# Altium PCB Amber_Main_Board.PcbDoc (part 1 of 6)
Units mm, origin at the board's own origin, x right, y up, seen from the top; angles counter-clockwise.
Board outline 90 x 23 mm, 4 copper layers (Top Layer, Power, Ground, Bottom Layer), stack 1.142 mm thick; 237 components, 104 nets, 614 pads, 347 vias.
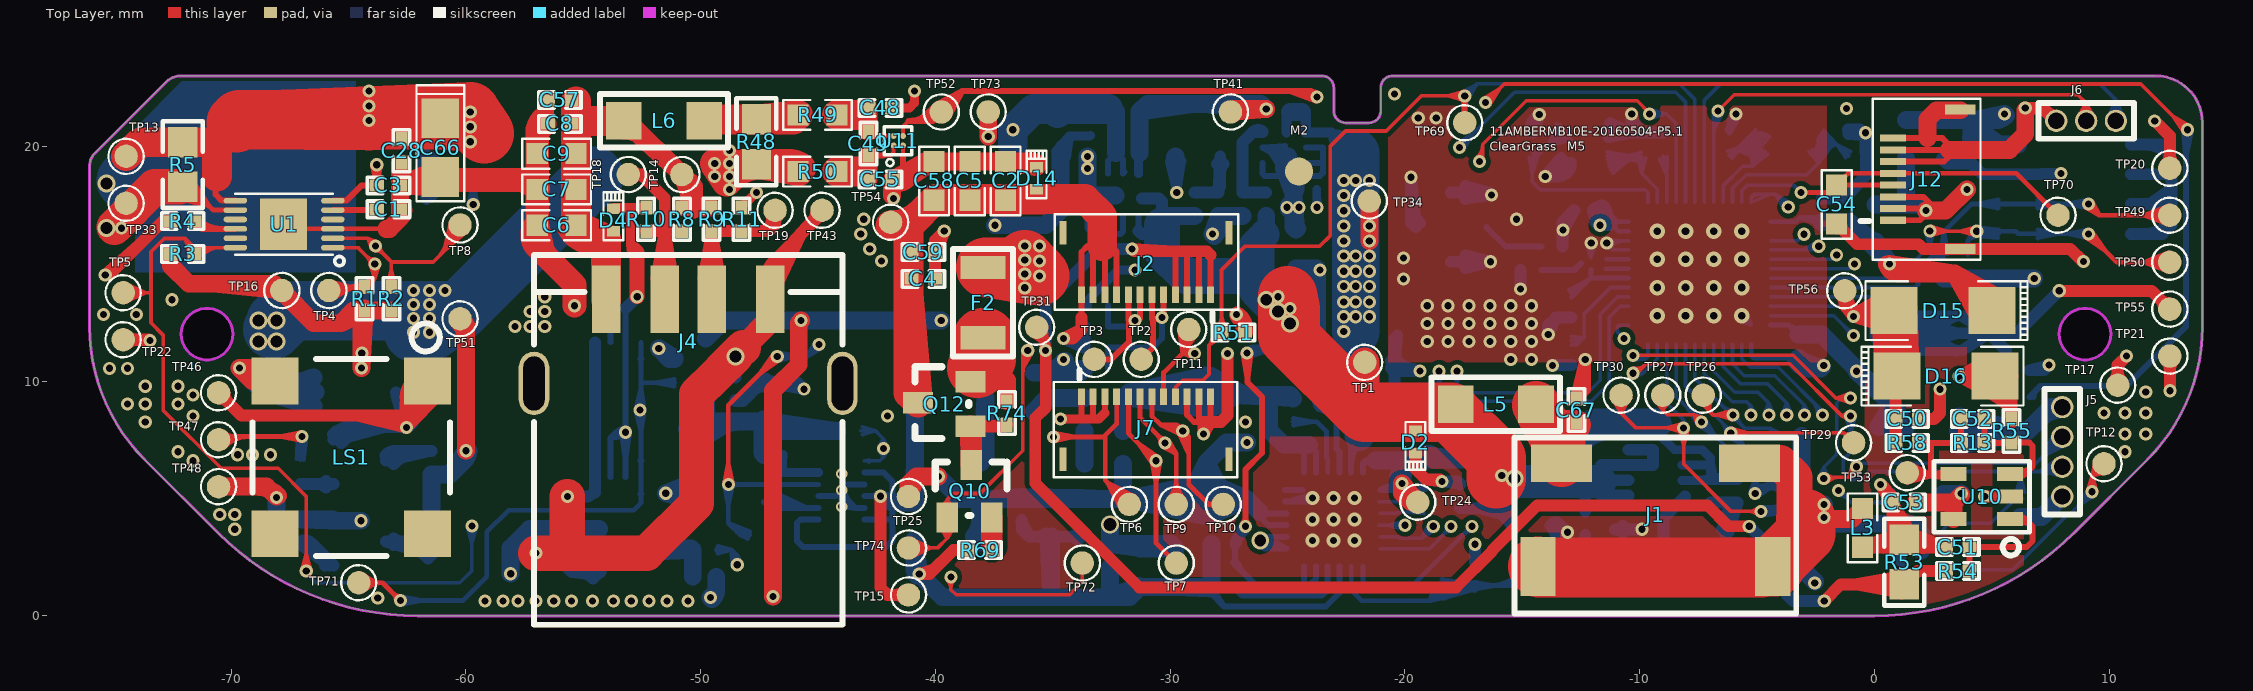
[diagram p0: Top Layer view]
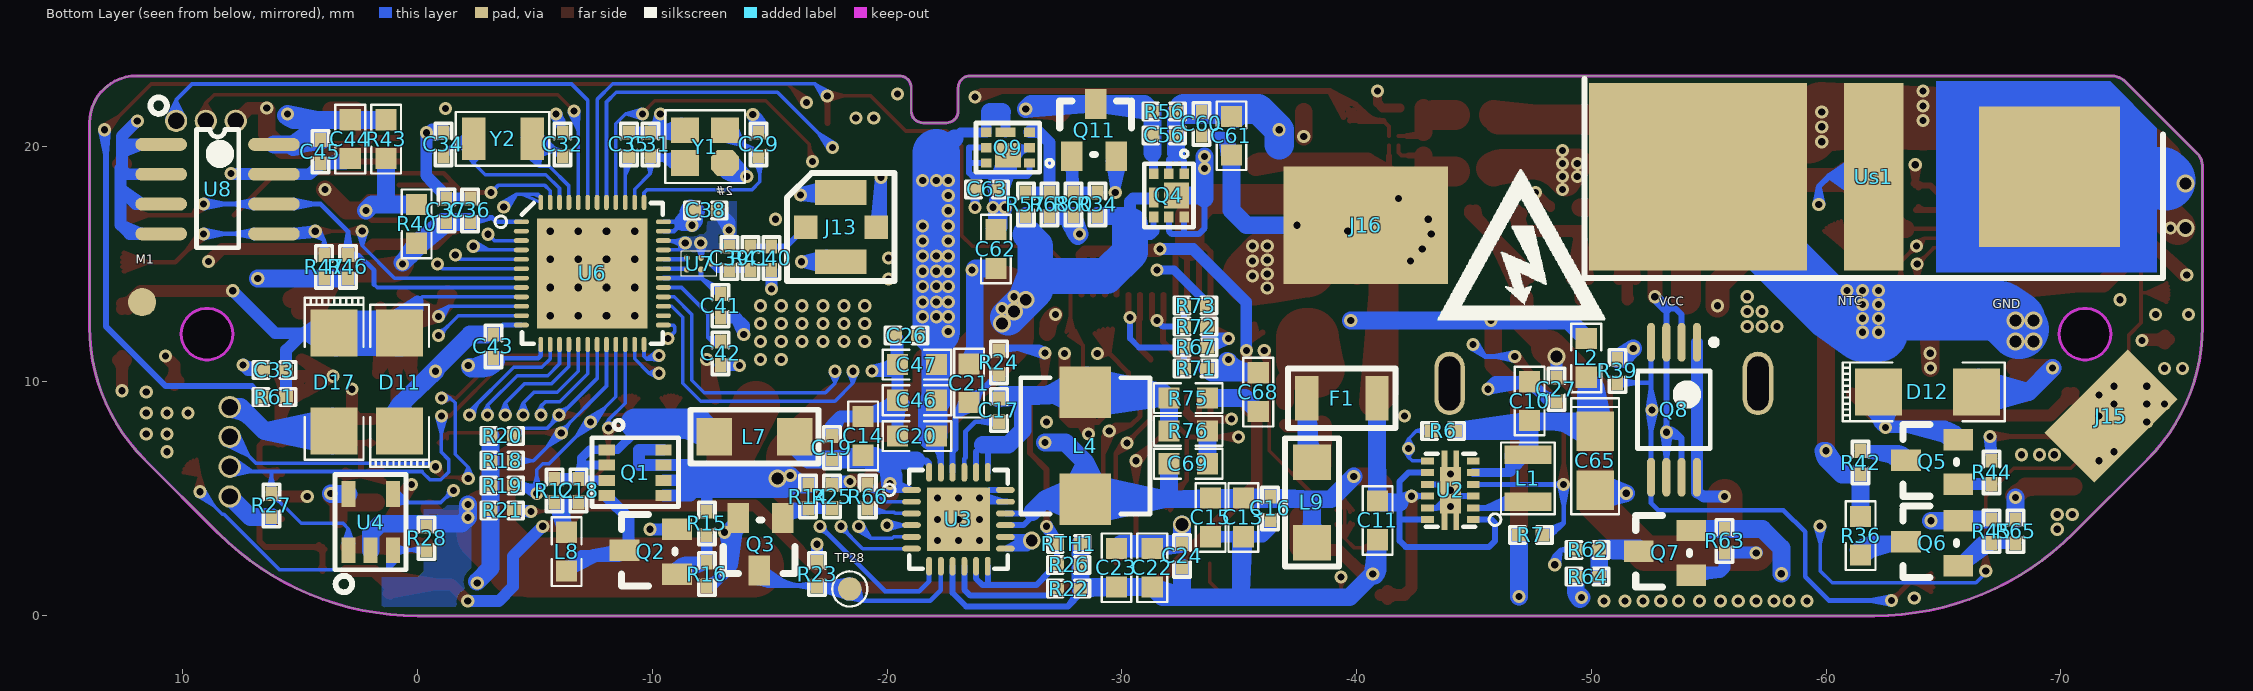
[diagram p1: Bottom Layer view, seen from below]
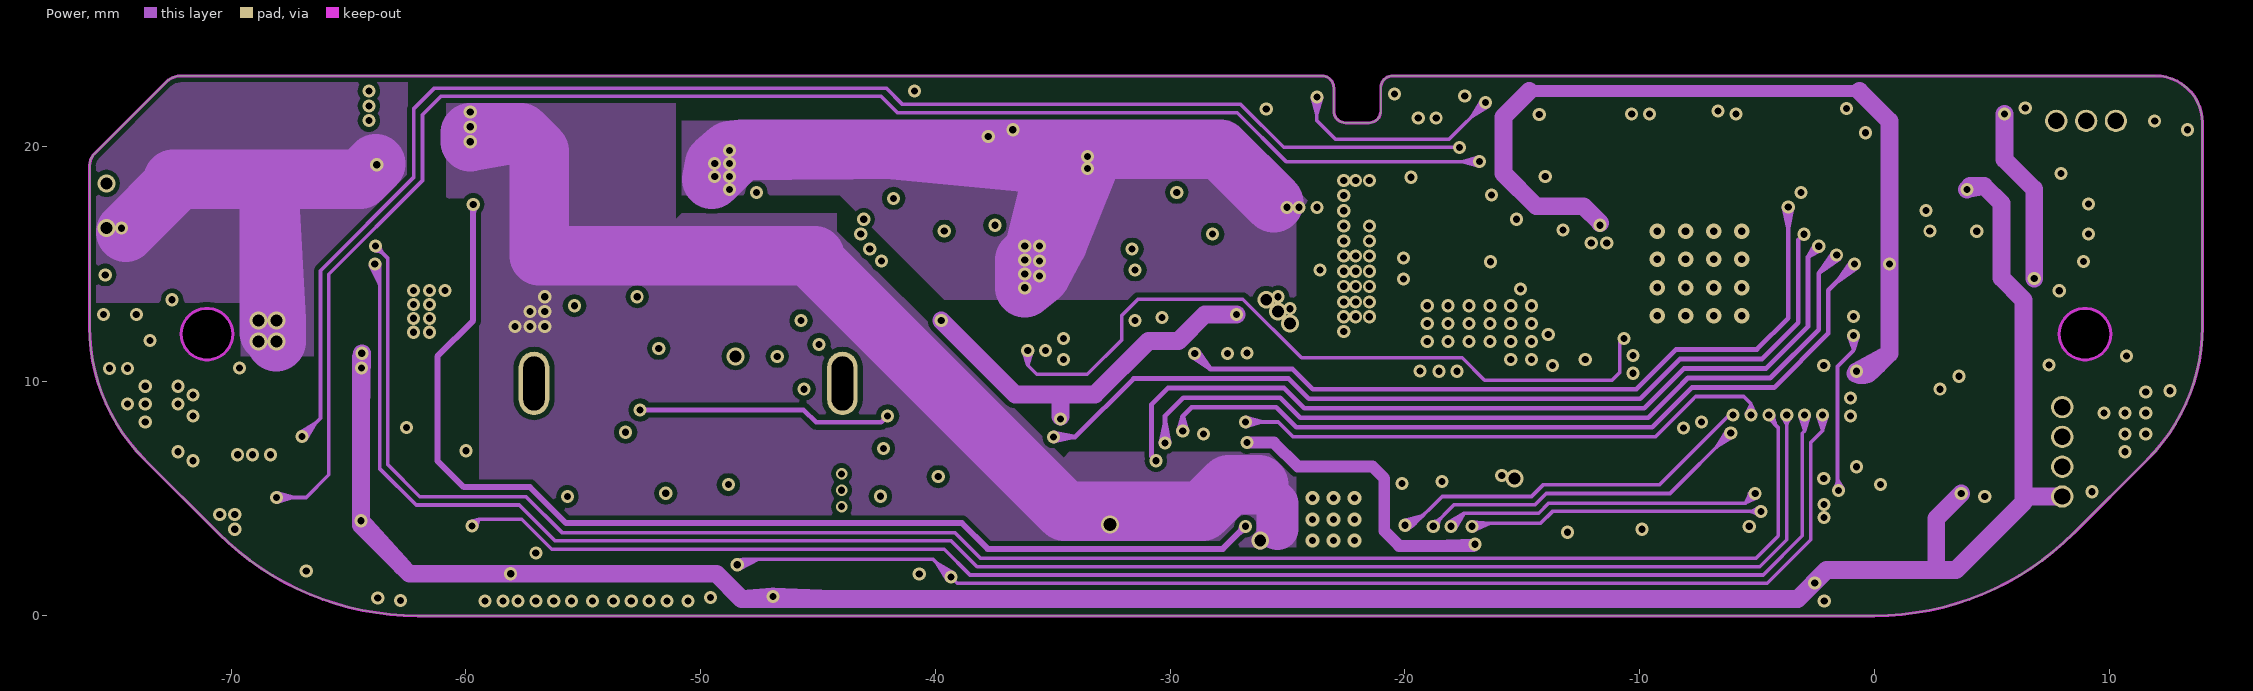
[diagram p2: Power]
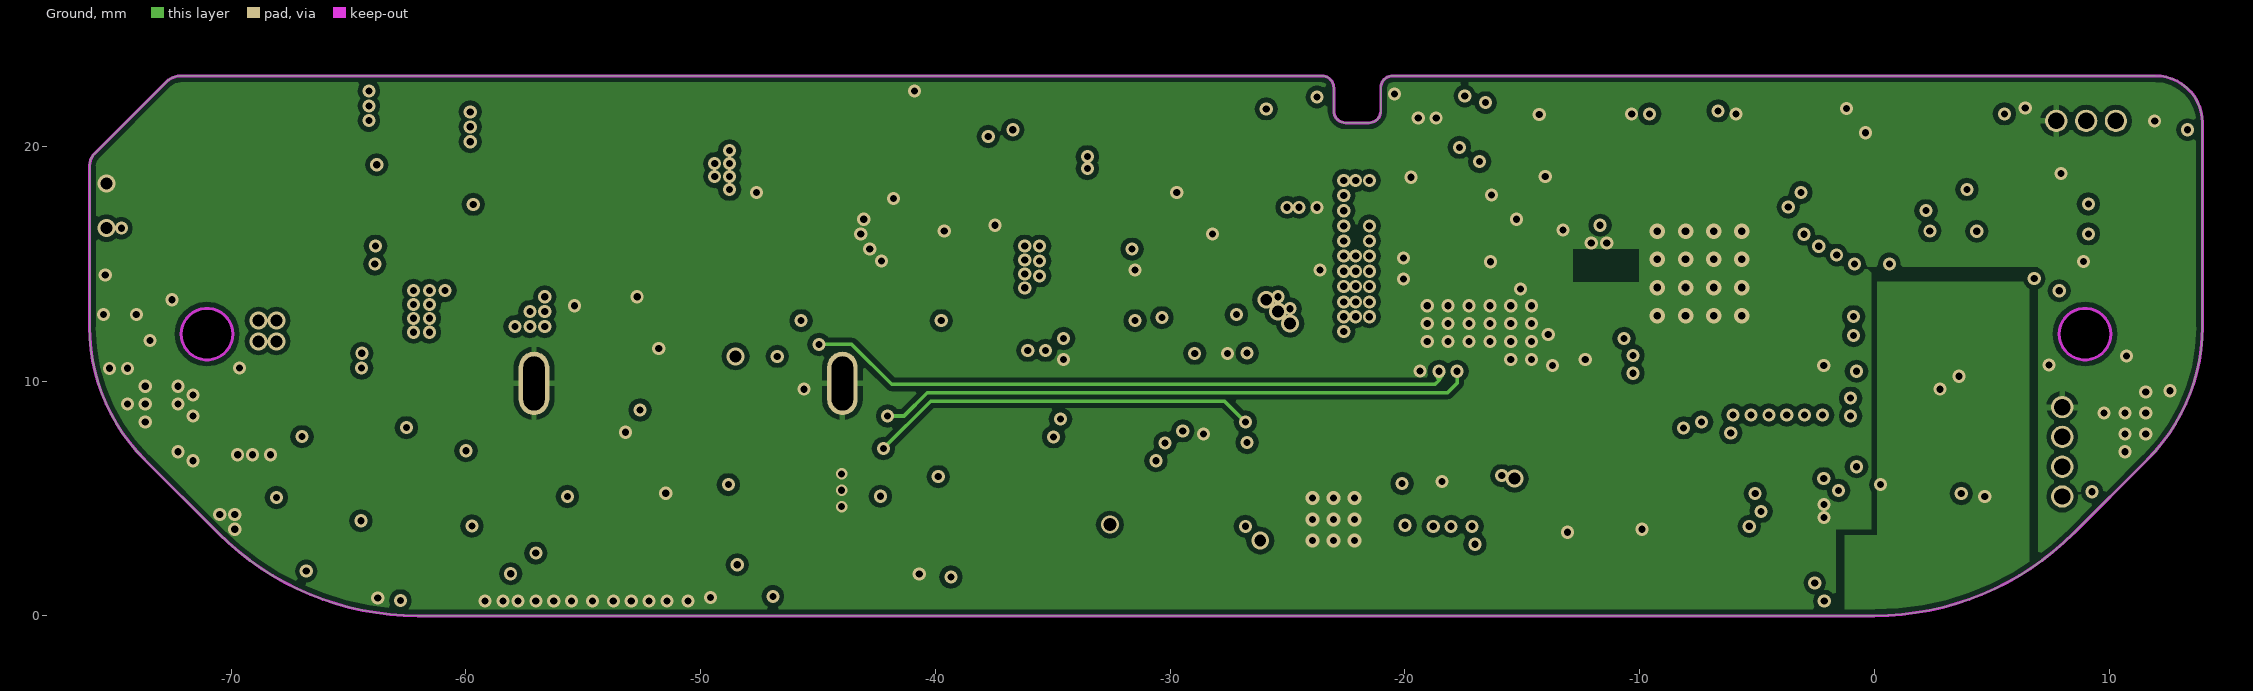
[diagram p3: Ground]
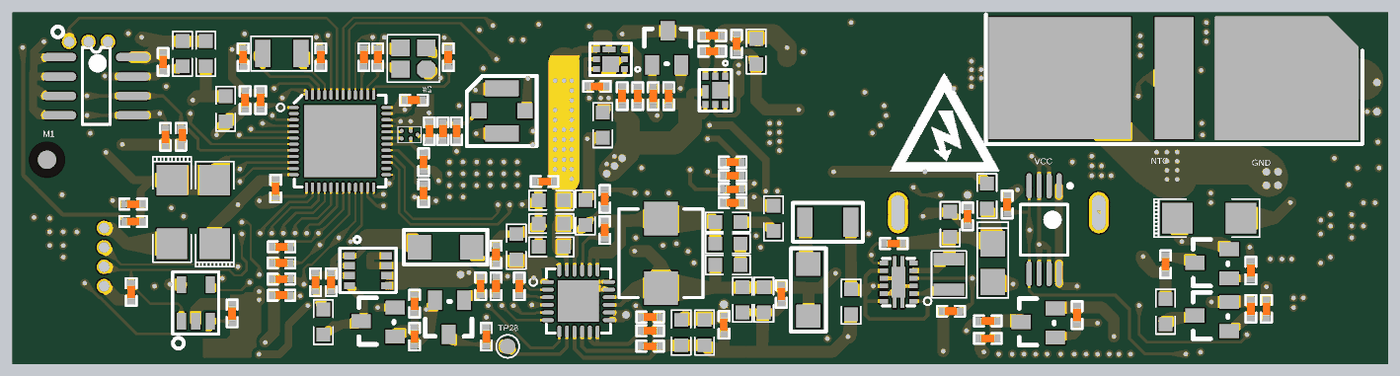
[diagram p9: 3D render of the assembled board from below, using the file's embedded part models]

## Layer stack, top to bottom
Top Layer: signal copper 0.0356
Dielectric: core 0.36, FR-4, Dk 4.8
Power: signal copper 0.0356
Dielectric: prepreg 0.32, FR-4, Dk 4.8
Ground: signal copper 0.0356
Dielectric: core 0.32, FR-4, Dk 4.8
Bottom Layer: signal copper 0.0356

## Board outline
-73.687,6.657 cw(c-68.03,12.314) -76.03,12.314 -76.03,19.177 cw(c-75.313,19.177) -75.82,19.684 -72.765,22.739 cw(c-72.136,22.111) -72.136,23 -23.53,23 cw(c-23.539,22.491) -23.03,22.482 -23.03,22.5 -23.03,21.5 ccw(c-22.53,21.5) -22.53,21 -21.53,21 ccw(c-21.53,21.5) -21.03,21.5 -21.03,22.5 cw(c-20.521,22.491) -20.512,23 11.97,23 cw(c11.97,21) 13.97,21 13.97,12.314 13.97,12.313 cw(c5.97,12.313) 11.627,6.657 8.485,3.515 cw(c0,12) 0,0 -62.06,0 cw(c-62.06,12) -70.545,3.515
cut-out: -71.03,10.9 cw(c-71.03,12) -72.13,12 cw(c-71.03,12) -71.03,13.1 cw(c-71.03,12) -69.93,12 cw(c-71.03,12)
cut-out: 8.97,10.9 cw(c8.97,12) 7.87,12 cw(c8.97,12) 8.97,13.1 cw(c8.97,12) 10.07,12 cw(c8.97,12)
cut-out: -71.03,10.9 cw(c-71.03,12) -72.13,12 cw(c-71.03,12) -71.03,13.1 cw(c-71.03,12) -69.93,12 cw(c-71.03,12)

## Design rules (kind name [scope] priority, off if disabled: settings)
Clearance [All] p1: gap=0.203
HoleSize [All] p1: absolutevalues=TRUE maxlimit=5.08 minlimit=0.025 maxpercent=80.000 minpercent=20.000
HoleToHoleClearance [All] p1 off: gap=0.254 allowstackedmicrovias=TRUE
MinimumSolderMaskSliver [All] p1: minsoldermaskwidth=0
PolygonConnect PolygonConnect_1 [IsVia] p1: connectstyle=Direct reliefconductorwidth=0.254 reliefentries=4 polygonreliefangle="90 Angle"
PolygonConnect [All] p2: connectstyle=Relief reliefconductorwidth=0.254 reliefentries=4 polygonreliefangle="90 Angle"
RoutingVias [All] p1: holewidth=0.711 width=1.27 viastyle="Through Hole" minholewidth=0.711 minwidth=1.27 maxholewidth=0.711 maxwidth=1.27
SilkToSilkClearance [All] p1: silktosilkclearance=0
SilkscreenOverComponentPads [All] p1: minsilkscreentomaskgap=0
SolderMaskExpansion [All] p1: expansion=0.102
Width [All] p1: maxlimit=5.08 minlimit=0.152 preferedwidth=0.254
23 further rules are at their usual default settings.

## Classes and differential pairs
component class WindCharger: C56 C60 C61 C62 C63 Q4 Q9 Q11 R34 R56 R57 R60 R68 TP41 TP73
component class "Management of Charging,Discharging,Tri-axis angle sensor": C13 C14 C15 C16 C17 C18 C19 C20 C21 C22 C23 C24 C26 C46 C47 C68 C69 F1 L4 L7 L8 L9 Q1 Q2 Q3 R9 R11 R15 R16 R18 R19 R20 R21 R22 R23 R24 R25 R26 R66 R75 R76 RTH1 Text TP24 TP25 TP26 TP27 TP28 TP29 TP30 TP34 U3
component class "BLE MCU,Watch Dog and Reset,EEPROM,Buzzer": A1 C29 C31 C32 C33 C34 C35 C36 C37 C38 C39 C40 C41 C42 C43 C44 C45 C50 D9 D11 D15 D16 D17 J5 J6 J13 L3 R27 R28 R40 R41 R43 R46 R47 R58 R61 TP12 TP49 TP50 TP55 TP56 U4 U6 U7 U8 Y1 Y2
component class "Charge,Discharge,Battery Monitor,DC DC BUCK": C1 C2 C3 C4 C5 C6 C7 C8 C9 C10 C11 C27 C28 C57 C58 C59 C65 C66 C67 D2 D4 D14 J1 J2 J4 L1 L2 L5 L6 Q7 Q8 R1 R2 R3 R4 R5 R6 R7 R8 R9 R10 R11 R39 R62 R63 R64 R67 R71 R72 R73 TP1 TP2 TP3 TP4 TP5 TP8 TP13 TP14 TP15 TP16 TP17 TP18 TP19 TP20 TP21 TP22 TP31 TP33 TP43 TP54 TP71 TP72 U1 U2 Us1
component class "Breath LED,Temp,Touch key,Motor": C48 C49 C51 C52 C53 C54 C55 D12 F2 J7 J12 J15 J16 LS1 M1 M2 Q5 Q6 Q10 Q12 R13 R36 R42 R44 R45 R48 R49 R50 R51 R53 R54 R55 R65 R69 R74 TP6 TP7 TP9 TP10 TP11 TP46 TP47 TP48 TP51 TP52 TP53 TP69 TP70 TP74 U10 U11

## Components (designator, comment, footprint, x,y, rotation, side; value= is the part's Value field where it differs from the comment)
C1 "0.47uF/10V/X7R/10%" 0402C -63.3,17.317 r0 top
C2 "22uF/10V/X5R/20%" 0603C -37.011,18.523 r90 top
C3 "1uF/10V/X7R/10%" 0402C -63.3,18.333 r0 top
C4 "0.1uF/10V/X7R/10%" 0402C -40.513,14.351 r0 top
C5 "22uF/10V/X5R/20%" 0603C -38.535,18.523 r90 top
C6 "22uF/10V/X5R/20%" 0603C -56.134,16.637 r180 top
C7 "22uF/10V/X5R/20%" 0603C -56.134,18.161 r180 top
C8 "0.1uF/10V/X7R/10%" 0402C -55.999,20.955 r180 top
C9 "22uF/10V/X5R/20%" 0603C -56.134,19.685 r180 top
C10 "10uF/10V/X7R/10%" 0603C -47.371,9.144 r90 bottom
C11 "10uF/10V/X7R/10%" 0603C -40.894,4.064 r270 bottom
C13 "10uF/10V/X7R/10%" 0603C -35.179,4.191 r270 bottom
C14 "10uF/10V/X7R/10%" 0603C -18.977,7.665 r90 bottom
C15 "10uF/10V/X7R/10%" 0603C -33.782,4.191 r270 bottom
C16 "0.1uF/10V/X7R/10%" 0402C -36.322,4.572 r270 bottom
C17 "47nF/10V/X7R/10%" 0402C -24.765,8.763 r270 bottom
C18 "1nF/10V/X7R/5%" 0402C -6.858,5.334 r90 bottom
C19 "1uF/10V/X7R/10%" 0402C -17.653,7.157 r90 bottom
C20 "22uF/10V/X5R/20%" 0603C -21.273,7.654 r0 bottom
C21 "4.7uF/10V/X7R/10%" 0603C -23.495,9.906 r90 bottom
C22 "22uF/10V/X5R/20%" 0603C -31.296,2.045 r270 bottom
C23 "22uF/10V/X5R/20%" 0603C -29.772,2.045 r270 bottom
C24 "0.1uF/10V/X7R/10%" 0402C -32.566,2.553 r270 bottom
C26 "0.1uF/10V/X7R/5%" 0402C -20.828,11.938 r180 bottom
C27 "0.1uF/10V/X7R/10%" 0402C -48.514,9.652 r270 bottom
C28 "0.1uF/10V/X7R/10%" 0402C -62.738,19.812 r270 top
C29 "12pF/16V/NPO/10%" 0402C -14.532,20.079 r270 bottom
C31 "12pF/16V/NPO/10%" 0402C -9.913,20.079 r270 bottom
C32 "12pF/16V/NPO/10%" 0402C -6.18,20.079 r270 bottom
C33 "0.1uF/10V/X7R/10%" 0402C 6.096,10.459 r0 bottom
C34 "12pF/16V/NPO/10%" 0402C -1.1,20.079 r270 bottom
C35 "0.1uF/10V/X7R/10%" 0402C -9.006,20.079 r270 bottom
C36 "0.1uF/10V/X7R/10%" 0402C -2.243,17.267 r270 bottom
C37 "1uF/10V/X7R/10%" 0402C -1.227,17.267 r270 bottom
C38 "1nF/10V/X7R/5%" 0402C -12.276,17.267 r0 bottom
C39 "0.2pF" 0402C -13.292,15.235 r90 bottom
C40 "DNM" 0402C -15.07,15.235 r270 bottom
C41 "2.2nF/10V/X7R/10%" 0402C -12.911,13.203 r90 bottom
C42 "47nF/10V/X7R/10%" 0402C -12.911,11.176 r90 bottom
C43 "0.1uF/10V/X7R/10%" 0402C -3.229,11.475 r90 bottom
C44 "10uF/10V/X7R/10%" 0603C 2.87,20.301 r270 bottom
C45 "0.1uF/10V/X7R/10%" 0402C 4.137,19.766 r270 bottom
C46 "22uF/10V/X5R/20%" 0603C -21.273,9.178 r0 bottom
C47 "22uF/10V/X5R/20%" 0603C -21.273,10.702 r0 bottom
C48 "0.1uF/10V/X7R/10%" 0402C -42.345,21.635 r180 top
C49 "1uF/10V/X7R/10%" 0402C -42.853,20.111 r270 top
C50 "0.1uF/10V/X7R/10%" 0402C 1.397,8.382 r0 top
C51 "1uF/10V/X7R/10%" 0402C 3.556,2.921 r0 top
C52 "1uF/10V/X7R/10%" 0402C 4.191,8.382 r180 top
C53 "1uF/10V/X7R/10%" 0402C 1.27,4.826 r0 top
C54 "10uF/10V/X7R/10%" 0603C -1.608,17.521 r270 top
C55 "0.1uF/10V/X7R/10%" 0402C -42.345,18.587 r0 top
C56 "1nF/10V/X7R/5%" 0402C -31.804,20.46 r180 bottom
C57 "0.1uF/10V/X7R/10%" 0402C -55.999,21.971 r180 top
C58 "22uF/10V/X5R/20%" 0603C -40.059,18.523 r90 top
C59 "0.1uF/10V/X7R/10%" 0402C -40.513,15.494 r0 top
C60 "1uF/10V/X7R/10%" 0402C -33.401,20.955 r270 bottom
C61 "10uF/10V/X7R/10%" 0603C -34.671,20.447 r270 bottom
C62 "10uF/10V/X7R/10%" 0603C -24.638,15.621 r270 bottom
C63 "1uF/10V/X7R/10%" 0402C -24.257,18.161 r0 bottom
C65 "220uF/6.3V" 3216 -50.165,6.604 r270 bottom
C66 "220uF/6.3V" 3216 -61.087,19.939 r270 top
C67 "0.1uF/10V/X7R/10%" 0402C -12.7,8.763 r90 top
C68 "1nF/10V/X7R/5%" 0603C -35.814,9.525 r90 bottom
C69 "1uF/10V/X7R/5%" 0603C -32.829,6.477 r180 bottom
D2 "VMNZC6.8CST2RA" 0402 -19.558,7.874 r270 top
D4 "VMNZC6.8CST2RA" 0402 -53.721,16.383 r90 top
D11 "RB160MM-30TR" DO-214AC 0.762,9.951 r270 bottom
D12 "RB160MM-30TR" DO-214AC -64.316,9.538 r0 bottom
D14 "VMNZC6.8CST2RA" 0402 -35.687,18.161 r90 top
D15 "RB160MM-30TR" DO-214AC 2.921,12.999 r0 top
D16 "RB160MM-30TR" DO-214AC 3.048,10.205 r180 top
D17 "RB160MM-30TR" DO-214AC 3.556,9.951 r90 bottom
F1 "250MA" 1206-FUSE -39.37,9.271 r180 bottom
F2 "500MA" 1206-FUSE -37.973,13.335 r270 top
J1 "MICRO_USB_B" MICRO-USB-AVX-PAD -9.33,4.3 r180 top locked
J2 "PoGo Pin Connector" FPC_CON12-BACK-MOLEX -31.03,15 r270 top locked
J4 "USB_A" USB_A_FCI -50.53,11.687 r270 top locked
J5 "Program" "PROGRAM - 1.27" 8.001,6.985 r90 top
J6 "Debug" "Debug- 1.27" 8.382,21.082 r180 top
J7 "Connector" FPC_CON12-BACK-MOLEX -31.03,8 r90 top locked
J12 "Hall Connector" FPC_CON8-KYOCERA 2.23,18.598 r180 top locked
J13 "IPEX" IPEX -18.034,16.555 r270 bottom locked
J15 "PAD1" PAD1 25.389,4.272 r180 bottom
J16 "PAD2" PAD2 21.844,-4.191 r180 bottom
L1 "1239AS-H-2R2M" 2520-TOKO -47.298,5.855 r90 bottom
L2 "BLM18AG601SN1" 0603R -49.784,10.16 r90 bottom
L3 "BLM18AG601SN1" 0603R -0.508,2.921 r90 top
L4 "2.2uH" MMD -28.448,7.239 r270 bottom locked
L5 "B5H DC1206RA601H30T" 1206 -16.129,9.017 r0 top
L6 "B5H DC1206RA601H30T" 1206 -51.562,21.082 r180 top
L7 "B5H DC1206RA601H30T" 1206 -14.351,7.633 r0 bottom
L8 "BLM18AG601SN1" 0603R -6.35,1.905 r90 bottom
L9 "B5H DC1206RA601H30T" 1206 -38.1,4.826 r270 bottom
LS1 "Buzzle" "BUZZER 7525" -64.886,6.744 r90 top
M1 "MARK" "MARK POINT"#1 11.734,13.36 r180 bottom
M2 "MARK" "MARK POINT"#2 -24.511,18.923 r0 top
Q1 "RQ1E050RPTR" TSMT8 -9.271,6.096 r180 bottom
Q2 "RK7002BMT116" SOT23 -11.049,1.778 r90 bottom
Q3 "RK7002BMT116" SOT23 -15.563,4.158 r0 bottom
Q4 "CSD25310Q2" DQK -32.004,17.907 r0 bottom
Q5 "2SA1036KT146R" SMT3 -65.633,5.601 r90 bottom
Q6 "RRR030P03TL" TSMT3 -64.516,3.093 r90 bottom
Q7 "RRR030P03TL" TSMT3 -53.14,2.68 r90 bottom
Q8 "GM8205A" TSSOP-8 -53.521,8.776 r270 bottom
Q9 "CSD25310Q2" DQK -25.146,19.939 r90 bottom
Q10 "RK7002BMT116" SOT23 -39.497,4.191 r0 top
Q11 "RK7002BMT116" SOT23 -27.867,19.571 r180 bottom
Q12 "RRR030P03TL" TSMT3 -39.624,9.017 r90 top
R1 "4.7K/1%" 0402R -64.316,13.507 r270 top
R2 "4.7K/1%" 0402R -63.173,13.507 r270 top
R3 "10K/1%" 0402R -72.063,15.412 r180 top
R4 "10K/1%" 0402R -72.063,16.809 r0 top
R5 "0.01R/1%" 0805 -72.063,19.222 r90 top
R6 "1M/1%" 0402R -43.688,7.874 r180 bottom
R7 "100K/1%" 0402R -47.425,3.442 r0 bottom
R8 "75K" 0402R -50.8,16.891 r270 top
R9 "43K" 0402R -49.53,16.891 r270 top
R10 "51K" 0402R -52.324,16.891 r90 top
R11 "51K" 0402R -48.26,16.891 r90 top
R12 "10K/1%" 0402R -5.842,5.334 r90 bottom
R13 "20K/1%" 0402R 4.191,7.366 r180 top
R14 "121K/1%" 0402R -16.637,5.08 r90 bottom
R15 "262K/1%" 0402R -12.319,3.937 r90 bottom
R16 "180K/1%" 0402R -12.319,1.778 r90 bottom
R18 "10K/1%" 0402R -3.61,6.606 r180 bottom
R19 "10K/1%" 0402R -3.61,5.548 r180 bottom
R20 "10K/1%" 0402R -3.61,7.665 r180 bottom
R21 "10K/1%" 0402R -3.61,4.49 r180 bottom
R22 "332R/1%" 0402R -27.74,1.156 r0 bottom
R23 "100K/1%" 0402R -17.018,1.778 r90 bottom
R24 "5.49K/1%" 0402R -24.765,10.795 r90 bottom
R25 "82K/1%" 0402R -17.653,5.08 r270 bottom
R26 "30.9K/1%" 0402R -27.74,2.172 r180 bottom
R27 "10K/1%" 0402R 6.223,4.699 r90 bottom
R28 "63K/1%" 0402R -0.381,3.302 r90 bottom
R34 "262K/1%" 0402R -28.956,17.526 r270 bottom
R36 "0R/1%" 0603R -61.468,4.236 r270 bottom
R39 "1M/1%" 0402R -51.108,10.427 r90 bottom
R40 "0R/1%" 0603R 0.043,17.521 r270 bottom
R41 "10nH" 0402R -14.181,15.235 r270 bottom
R42 "0R/1%" 0402R -61.468,6.522 r90 bottom
R43 "0R/1%" 0603R 1.343,21.127 r270 bottom
R44 "1K/1%" 0402R -67.056,6.109 r90 bottom
R45 "100K/1%" 0402R -67.056,3.601 r270 bottom
R46 "4.7K/1%" 0402R 2.964,14.862 r270 bottom
R47 "4.7K/1%" 0402R 3.98,14.862 r270 bottom
R48 "10mR/1%" 0805 -47.625,20.193 r90 top
R49 "0R" 0603R -45.847,21.336 r0 top
R50 "0R" 0603R -45.847,18.923 r0 top
R51 "10K/1%" 0402R -27.305,12.065 r180 top
R53 "50mR/1%" 0805 1.27,2.286 r270 top
R54 "1K/1%" 0402R 3.556,1.905 r0 top
R55 "1K/1%" 0402R 5.842,7.874 r90 top
R56 "10K/1%" 0402R -31.804,21.476 r180 bottom
R57 "0R/1%" 0402R -25.908,17.526 r270 bottom
R58 "1K/1%" 0402R 1.397,7.366 r180 top
R60 "180K/1%" 0402R -27.94,17.526 r90 bottom
R61 "0R/1%" 0402R 6.096,9.316 r180 bottom
R62 "0R/1%" 0402R -49.838,2.807 r180 bottom
R63 "100K/1%" 0402R -55.68,3.188 r270 bottom
R64 "1M/1%" 0402R -49.838,1.664 r180 bottom
R65 "1K/1%" 0402R -68.072,3.601 r90 bottom
R66 "200R/1%" 0402R -19.177,5.08 r270 bottom
R67 "75K" 0402R -33.139,11.43 r0 bottom
R68 "1M/1%" 0402R -26.924,17.526 r90 bottom
R69 "10K" 0402R -38.1,2.794 r0 top
R71 "51K" 0402R -33.139,10.541 r180 bottom
R72 "43K" 0402R -33.139,12.319 r0 bottom
R73 "51K" 0402R -33.139,13.208 r180 bottom
R74 "549K" 0402R -36.957,8.636 r270 top
R75 "100R/1%" 0603R -32.004,9.271 r180 bottom
R76 "100R/1%" 0603R -32.004,7.874 r180 bottom
RTH1 "10K/1%" 0402R -27.74,3.061 r180 bottom
TP1 "TEST" "TEST PAD" -21.717,10.795 r90 top
TP2 "TEST" "Test Pad" -31.233,10.922 r90 top
TP3 "TEST" "Test Pad" -33.233,10.922 r90 top
TP4 "TEST" "TEST PAD" -65.84,13.856 r90 top
TP5 "TEST" "TEST PAD" -74.603,13.761 r90 top
TP6 "TEST" "Test Pad" -31.74,4.744 r90 top
TP7 "TEST" "Test Pad" -29.74,2.244 r90 top
TP8 "TEST" "TEST PAD" -60.252,16.65 r90 top
TP9 "TEST" "Test Pad" -29.74,4.744 r90 top
TP10 "TEST" "Test Pad" -27.74,4.744 r90 top
TP11 "TEST" "Test Pad" -29.21,12.192 r90 top
TP12 "TEST" "Test Pad" 9.779,6.477 r90 top
TP13 "TEST" "TEST PAD" -74.476,19.571 r90 top
TP14 "TEST" "TEST PAD" -50.8,18.796 r90 top
TP15 "TEST" "TEST PAD" -41.148,0.889 r90 top
TP16 "TEST" "TEST PAD" -67.84,13.856 r90 top
TP17 "TEST" "TEST PAD" 10.36,9.824 r0 top
TP18 "TEST" "TEST PAD" -53.086,18.796 r90 top
TP19 "TEST" "TEST PAD" -46.831,17.272 r90 top
TP20 "TEST" "TEST PAD" 12.584,19.063 r90 top
TP21 "TEST" "TEST PAD" 12.584,11.063 r90 top
TP22 "TEST" "TEST PAD" -74.603,11.761 r90 top
TP24 "TEST" "TEST PAD" -19.453,4.839 r90 top
TP25 "TEST" "TEST PAD" -41.148,5.08 r90 top
TP26 "TEST" "TEST PAD" -7.293,9.398 r90 top
TP27 "TEST" "TEST PAD" -9.017,9.398 r90 top
TP28 "TEST" "TEST PAD" -18.415,1.143 r270 bottom
TP29 "TEST" "TEST PAD" -0.889,7.366 r90 top
TP30 "TEST" "TEST PAD" -10.795,9.398 r90 top
TP31 "TEST" "TEST PAD" -35.687,12.287 r90 top
TP33 "TEST" "Test Pad" -74.476,17.571 r90 top
TP34 "TEST" "TEST PAD" -21.517,17.666 r90 top (schematic designator TP16)
TP41 "TEST" "TEST PAD" -27.432,21.463 r0 top
TP43 "TEST" "TEST PAD" -44.831,17.272 r90 top
TP46 "TEST" "TEST PAD" -70.539,9.5 r90 top
TP47 "TEST" "TEST PAD" -70.539,7.5 r90 top
TP48 "TEST" "TEST PAD" -70.539,5.5 r90 top
TP49 "TEST" "TEST PAD" 12.584,17.063 r90 top
TP50 "TEST" "TEST PAD" 12.584,15.063 r90 top
TP51 "TEST" "TEST PAD" -60.252,12.65 r90 top
TP52 "TEST" "TEST PAD" -39.751,21.463 r90 top
TP53 "TEST" "Test Pad" 1.397,6.096 r90 top
TP54 "TEST" "Test Pad" -41.91,16.764 r90 top
TP55 "TEST" "Test Pad" 12.584,13.063 r90 top
TP56 "TEST" "Test Pad" -1.27,13.843 r90 top
TP69 "TEST" "Test Pad" -17.453,21 r90 top
TP70 "TEST" "Test Pad" 7.82,17.063 r90 top
TP71 "TEST" "Test Pad" -64.57,1.41 r90 top
TP72 "TEST" "Test Pad" -33.74,2.244 r90 top
TP73 "TEST" "Test Pad" -37.751,21.463 r90 top
TP74 "TEST" "Test Pad" -41.148,2.889 r90 top
U1 "BQ27441DRZR-G1A" DRZ -67.745,16.682 r180 top
U2 "TPS62740DSSR" DSS -43.996,5.347 r0 bottom
U3 "BQ24195RGER" RGE -23.041,4.109 r180 bottom
U4 "STWD100YNYWY3F" SOT23-5 1.997,3.988 r90 bottom
U6 "nRF51822QFAA" QFN48 -7.447,14.583 r180 bottom
U7 "BAL-NRF01D3" ECOPACK -11.992,14.999 r180 bottom
U8 "M24C64R-D RMN6TP/P" SO8N 8.52,18.174 r180 bottom
U10 "LMV321IDBVR" SOT23-5 4.572,5.08 r180 top
U11 "INA216A3YFFR" YFF -41.583,20.238 r90 top
Us1 "PL605798P" BATTERY -62.03,18.7 r180 bottom locked
Y1 "16M" XTALSMD2-2520 -12.246,19.984 r180 bottom
Y2 "32.768K" XTALSMD2-3215 -3.64,20.315 r180 bottom

## Footprints (in the part's own frame and the unit in brackets; to place one, negate y for a bottom-side part, rotate by r counter-clockwise, add the part's x,y. Pads: shape width x height; smd on the part's side, far side on the other; paste and mask are expansions set on the pad)
0402 [mm]
  rect 0.45x0.55 smd: 1(0.95,0) 2(0,0)
  silkscreen extent -0.38,-0.42 1.65,0.42
0402C [mm]
  rect 0.6x0.5 smd: 1(-0.5,0) 2(0.5,0)
  silkscreen extent -0.9,-0.35 0.9,0.35, body extent -0.51,-0.25 0.51,0.25, height 0.5
0402R [mm]
  rect 0.6x0.5 smd: 1(-0.5,0) 2(0.5,0)
  silkscreen extent -0.9,-0.35 0.9,0.35, body extent -0.51,-0.25 0.51,0.25, height 0.5
0603C [mm]
  rect 0.9x0.9 smd: 1(-0.826,0) 2(0.826,0)
  silkscreen extent -1.46,-0.64 1.46,0.64, body extent -1.38,-0.55 1.38,0.55, height 0.9
0603R [mm]
  rect 0.9x0.9 smd: 1(0,0) 2(1.651,0)
  silkscreen extent -0.64,-0.64 2.29,0.64, body extent -0.55,-0.55 2.2,0.55, height 0.5
0805 [mm]
  rect 1.3x1.25 smd: 1(-0.95,0) 2(0.95,0)
  silkscreen extent -1.85,-0.85 1.85,0.85, body extent -1.7,-0.73 1.7,0.73, height 0.6
1206 [mm]
  rect 1.52x1.6 smd: 1(1.71,0) 2(-1.71,0)
  silkscreen extent -2.73,-1.14 2.73,1.14, body extent -2.57,-0.9 2.57,0.9, height 0.9
1206-FUSE [mm]
  rect 1x1.9 smd: 1(1.5,0) 2(-1.5,0)
  silkscreen extent -2.29,-1.27 2.29,1.27, body extent -2.43,-1.2 2.48,1.2, height 1.4
2520-TOKO [mm]
  rect 0.8x2 smd: 1(-1,0) 2(1,0)
  silkscreen extent -1.52,-1.14 1.52,1.14, body extent -1.5,-1.1 1.5,1.1, height 1.2
3216 [mm]
  rect 1.7x1.6 smd: 1(-1.256,0) 2(1.256,0)
  silkscreen extent -2.67,-1.02 2.29,1.02, body extent -1.72,-0.85 1.72,0.85, height 1.1
BATTERY [mm]
  rect 9.3x8 smd: 1(-7.485,0)
  rect 2.54x8 smd: 2(0,0)
  rect 6x6 smd: 3(7.485,0)
  Top Layer region: 2.667,-4.064 12.065,-4.064 12.065,2.064 10.065,4.064 2.667,4.064
"BUZZER 7525" [mm]
  rect 2x2 smd: 1(3.25,-3.25) 2(3.25,3.25) 3(-3.25,3.25) 4(-3.25,-3.25)
  silkscreen extent -4.2,-4.2 5.71,4.2, body extent -4.35,-4.35 4.35,4.35, height 2.5
"Debug- 1.27" [mm]
  round 0.95 hole 0.7: 1(-1.905,0) 2(-0.635,0) 3(0.635,0)
  silkscreen extent -2.67,-0.76 1.4,0.76, body extent -2.48,-0.58 1.21,0.58
DO-214AC [mm]
  rect 2x2 smd: 1(2.085,0) 2(-2.085,0)
  silkscreen extent -3.3,-1.25 3.6,1.25, body extent -3.19,-1.1 3.19,1.1, height 0.9
DQK [mm]
  rect 0.4x0.455 smd: 1(-0.65,-0.923) 2(0,-0.923) 3(0.65,-0.923) 4(0.65,0.923) 5(0,0.923) 6(-0.65,0.923)
  rect 1.05x1.1 smd: 7(-0.325,0)
  rect 0.4x0.85 smd: 8(0.65,0.096)
  silkscreen extent -1.05,-1.93 1.05,1.35, body extent -0.95,-1.25 0.95,1.25, height 0.8
DRZ [mm]
  oval 1x0.24 smd: 1(-2.075,1) 2(-2.075,0.6) 3(-2.075,0.2) 4(-2.075,-0.2) 5(-2.075,-0.6) 6(-2.075,-1) 7(2.075,-1) 8(2.075,-0.6) 9(2.075,-0.2) 10(2.075,0.2) 11(2.075,0.6) 12(2.075,1)
  rect 2x2.2 smd: 13(0.025,0)
  silkscreen extent -2.56,-1.3 2.08,1.77, body extent -2.68,-1.24 2.68,1.24, height 1
DSS [mm] "QFN, 12-Leads, Body 3.1x2.1mm (max), Pitch 0"
  rect 0.55x0.3 smd: 1(-0.975,1.25) 2(-0.975,0.75) 3(-0.975,0.25) 4(-0.975,-0.25) 5(-0.975,-0.75) 6(-0.975,-1.25) 7(0.975,-1.25) 8(0.975,-0.75) 9(0.975,-0.25) 10(0.975,0.25) 11(0.975,0.75) 12(0.975,1.25)
  rect 0.9x2 smd: 13(0,0)
  rect 0.25x0.7 smd: 14(-0.25,-1.35) 15(0.25,-1.35) 16(-0.25,1.35) 17(0.25,1.35)
  silkscreen extent -2.15,-1.55 1.05,1.55, body extent -1.05,-1.55 1.05,1.55, height 0.8
ECOPACK [mm]
  round 0.26 smd: 1(-0.516,-0.25) 2(-0.516,0.25) 3(0.083,-0.25) 4(0.083,0.25) 5(0.517,0)
  silkscreen extent -0.76,-0.53 0.76,0.53, body extent -0.75,-0.48 0.75,0.48, height 0.69
FPC_CON8-KYOCERA [mm]
  rect 1.1x0.3 smd: 1(1.435,1.75) 2(1.435,1.25) 3(1.435,0.75) 4(1.435,0.25) 5(1.435,-0.25) 6(1.435,-0.75) 7(1.435,-1.25) 8(1.435,-1.75)
  rect 1.3x0.42 smd: 9(-1.435,2.97) 10(-1.435,-2.97)
  silkscreen extent -2.29,-3.43 2.83,3.43, body extent -2.19,-3.28 2.09,3.28, height 1
FPC_CON12-BACK-MOLEX [mm]
  rect 0.7x0.3 smd: 1(1.325,2.75) 2(1.325,2.25) 3(1.325,1.75) 4(1.325,1.25) 5(1.325,0.75) 6(1.325,0.25) 7(1.325,-0.25) 8(1.325,-0.75) 9(1.325,-1.25) 10(1.325,-1.75) 11(1.325,-2.25) 12(1.325,-2.75)
  rect 1x0.3 smd: 13(-1.325,3.54) 14(-1.325,-3.54)
  silkscreen extent -2.1,-3.89 2.47,3.94, body extent -1.93,-3.79 1.78,3.79, height 1
IPEX [mm]
  rect 1x1 smd: 1(0,-1.5) 3(0,1.5)
  rect 1.05x2.2 smd: 2(-1.475,0) 4(1.475,0)
  silkscreen extent -2.3,-2.3 2.3,2.29, body extent -2.1,-2.1 2.1,2.1, height 1.25
"MARK POINT"#1 [mm]
  round 1.2 smd: 4(0,0)
  round 2.4 on Bottom Solder: 5(0,0)
"MARK POINT"#2 [mm]
  round 1.2 smd: 4(0,0)
  round 2.4 on Top Solder: 5(0,0)
MICRO-USB-AVX-PAD [mm]
  rect 2.6x1.6 smd: 1(4,-2.203) 2(-4,-2.203)
  rect 1.5x2.5 smd: 3(-5,2.204) 4(5,2.204)
  silkscreen extent -6,-3.3 6,4.2, body extent -5.9,-3.15 5.9,4.01, height 3.9
MMD [mm]
  rect 2.2x2.2 smd: 1(-2.275,0) 2(2.275,0)
  silkscreen extent -2.9,-2.75 2.9,2.75, body extent -2.87,-2.72 2.87,2.72, height 1.8
PAD1 [mm]
  rect 3x5 smd rot 135: 1(97.525,4.237)
PAD2 [mm]
  rect 7x5 smd: 2(62.23,20.828)
"PROGRAM - 1.27" [mm]
  round 0.95 hole 0.7: 1(-1.905,0) 2(-0.635,0) 3(0.635,0) 4(1.905,0)
  silkscreen extent -2.67,-0.76 2.67,0.76, body extent -2.48,-0.58 2.48,0.58
QFN48 [mm]
  oval 0.65x0.2 smd: 1(-3.025,2.2) 2(-3.025,1.8) 3(-3.025,1.4) 4(-3.025,1) 5(-3.025,0.6) 6(-3.025,0.2) 7(-3.025,-0.2) 8(-3.025,-0.6) 9(-3.025,-1) 10(-3.025,-1.4) 11(-3.025,-1.8) 12(-3.025,-2.2) 25(3.025,-2.2) 26(3.025,-1.8) 27(3.025,-1.4) 28(3.025,-1) 29(3.025,-0.6) 30(3.025,-0.2) 31(3.025,0.2) 32(3.025,0.6) 33(3.025,1) 34(3.025,1.4) 35(3.025,1.8) 36(3.025,2.2)
  oval 0.2x0.65 smd: 13(-2.2,-3.025) 14(-1.8,-3.025) 15(-1.4,-3.025) 16(-1,-3.025) 17(-0.6,-3.025) 18(-0.2,-3.025) 19(0.2,-3.025) 20(0.6,-3.025) 21(1,-3.025) 22(1.4,-3.025) 23(1.8,-3.025) 24(2.2,-3.025) 37(2.2,3.025) 38(1.8,3.025) 39(1.4,3.025) 40(1,3.025) 41(0.6,3.025) 42(0.2,3.025) 43(-0.2,3.025) 44(-0.6,3.025) 45(-1,3.025) 46(-1.4,3.025) 47(-1.8,3.025) 48(-2.2,3.025)
  rect 4.7x4.7 smd: 49(0,0)
  silkscreen extent -4.15,-3 3,3, body extent -3,-3 3,3, height 0.9
RGE [mm]
  oval 0.8x0.25 smd: 1(-2,1.25) 2(-2,0.75) 3(-2,0.25) 4(-2,-0.25) 5(-2,-0.75) 6(-2,-1.25) 13(2,-1.25) 14(2,-0.75) 15(2,-0.25) 16(2,0.25) 17(2,0.75) 18(2,1.25)
  oval 0.25x0.8 smd: 7(-1.25,-2) 8(-0.75,-2) 9(-0.25,-2) 10(0.25,-2) 11(0.75,-2) 12(1.25,-2) 19(1.25,2) 20(0.75,2) 21(0.25,2) 22(-0.25,2) 23(-0.75,2) 24(-1.25,2)
  rect 2.7x2.7 smd: 25(0,0)
  silkscreen extent -3.2,-2.1 2.1,2.1, body extent -2.08,-2.07 2.07,2.08, height 1
SMT3 [mil]
  rect 36x50 smd: 1(75,0) 2(0,0) 3(40,88)
  silkscreen extent -20,3 100,93, body extent -22,-29 97,117, height 37
SO8N [mm]
  oval 2.2x0.55 smd: 1(-2.4,1.905) 2(-2.4,0.635) 3(-2.4,-0.635) 4(-2.4,-1.905) 5(2.4,-1.905) 6(2.4,-0.635) 7(2.4,0.635) 8(2.4,1.905)
  silkscreen extent -2.86,-2.5 0.9,3.91, body extent -2,-2.5 2,2.5, height 1.75
SOT23 [mil]
  rect 36x50 smd: 1(75,0) 2(0,0) 3(40,88)
  silkscreen extent -20,3 100,93, body extent -22,-29 97,117, height 37
SOT23-5 [mm]
  rect 1.1x0.6 smd: 1(-1.2,0.95) 2(-1.2,0) 3(-1.2,-0.95) 4(1.2,-0.95) 5(1.2,0.95)
  silkscreen extent -2.99,-1.5 2.03,1.52, body extent -0.87,-1.5 0.87,1.5, height 1.45
"TEST PAD" [mm]
  round 1 smd: 1(0,0)
  silkscreen extent -0.75,-0.75 0.75,0.75, body extent -0.6,-0.6 0.6,0.6, height 0.1
"Test Pad" [mm]
  round 1 smd: 1(0,0)
  silkscreen extent -0.75,-0.75 0.75,0.75, body extent -0.6,-0.6 0.6,0.6, height 0.1
TSMT3 [mil]
  rect 36x50 smd: 1(-37.5,-44) 2(37.5,-44) 3(2.5,44)
  silkscreen extent -58,-41 62,49, body extent -60,-73 60,73, height 39
TSMT8 [mm]
  rect 0.7x0.47 smd: 1(-1.205,0.975) 2(-1.205,0.325) 3(-1.205,-0.325) 4(-1.205,-0.975) 5(1.205,-0.975) 6(1.205,-0.325) 7(1.205,0.325) 8(1.205,0.975)
  silkscreen extent -1.84,-1.44 1.84,2.23, body extent -1.18,-1.55 1.32,1.55, height 0.85
TSSOP-8 [mm]
  oval 1.65x0.35 smd: 1(-2.875,0.975) 2(-2.875,0.325) 3(-2.875,-0.325) 4(-2.875,-0.975) 5(2.875,-0.975) 6(2.875,-0.325) 7(2.875,0.325) 8(2.875,0.975)
  silkscreen extent -3,-1.55 1.65,1.82, body extent -2.25,-1.55 2.25,1.55, height 1.2
USB_A_FCI [mm]
  rect 2.88x1.22 smd: 1(-1.79,-3.5) 2(-1.79,-1) 3(-1.79,1) 4(-1.79,3.5)
  oval 2.7x1.3 hole 0.9 slot 2.3 at 0 deg: 5(1.79,6.57) 6(1.79,-6.57)
  silkscreen extent -3.68,-6.57 12.07,6.57, body extent -3.33,-6.5 12.09,6.5, height 7
XTALSMD2-2520 [mm]
  rect 1.2x1.1 smd: 1(-0.85,-0.7) 3(0.85,0.7) 4(-0.85,0.7)
  oct 1.2x1.1 smd: 2(0.85,-0.7)
  silkscreen extent -1.7,-1.55 1.7,1.55, body extent -1.55,-1.35 1.55,1.35, height 0.5
XTALSMD2-3215 [mm]
  rect 1x1.8 smd: 1(-1.25,0) 2(1.25,0)
  silkscreen extent -2.01,-1.14 1.98,1.14, body extent -1.85,-1 1.85,1, height 0.9
YFF [mm] "BGA, 4-Leads, Bo"
  round 0.25 smd: A1(-0.2,0.2) A2(0.2,0.2) B1(-0.2,-0.2) B2(0.2,-0.2)
  body extent -0.38,-0.38 0.38,0.38, height 0.63

## Part data
C1 C2 C3 C4 C5 C6 C7 C8 C9 C13 C14 C15 C16 C17 C18 C19 C20 C21 C22 C23 C24 C26 C27 C28 C29 C31 C32 C33 C34 C35 C36 C37 C38 C39 C41 C42 C43 C44 C45 C46 C47 C48 C49 C50 C51 C52 C53 C54 C55 C56 C57 C58 C59 C60 C61 C62 C63 C67 C69: library part CAP, "厂家：Murata，"
C10 C11: library part CAP, "厂?"
C40: library part CAP, "None"
C65 C66: library part Cap, "厂家：ROHM"
C68: library part CAP, "厂家：M"
D2 D4 D14: library part ESD_1, "厂家：ROHM"
D11 D12 D15 D16 D17: library part "Schottky barrier rec", "厂家：ROH"
F1 F2: library part FUSE2, "厂家£"
J1: library part USB_B, "厂家：AVX，Ð"
J2: library part Po, "厂家：MOLEX"
J4: "厂家："
J5: "厂家"
J6: library part Debug_1, "厂家"
J7: library part "Temp Connector", "厂家：Molex"
J12: library part "Temp Connector", "厂家：¾"
J13: library part ANTA, "厂家：Mole"
J15 J16: "None"
L1: library part CHOKE, "厂家：Toko"
L2 L3 L8: library part CHOKE, "厂家：MURATA"
L4: library part CHOKE, "厂家£ºMag£"
L5 L6 L7 L9: library part CHOKE, "厂家：宇"
LS1: library part Speaker, "厂家：³"
M1 M2: library part PAD1, "None"
Q1: library part RQ1, "厂家：ROH"
Q2 Q3: "厂家：Visha"
Q4 Q9: "厂家：T"
Q5: library part PNP, "厂家：ROHM"
Q6 Q7 Q12: library part PMOS, "厂家：ROH"
Q8: "厂家£"
Q10: library part RK7002, "厂家：ROH"
Q11: library part RK7002, "厂家：Visha"
R1 R2 R3 R4 R5 R7 R8 R9 R10 R11 R13 R15 R16 R18 R19 R20 R21 R22 R23 R24 R25 R26 R27 R28 R34 R46 R47 R48 R51 R53 R56 R60 R66 R67 R71 R72 R73 R75 R76 RTH1: library part RES1, "厂家£ºYageo£"
R6 R36 R39 R40 R41 R42 R43 R49 R50 R54 R55 R57 R58 R61 R62 R68: library part RES1, "厂家：Yageo"
R12 R14: library part RES1, "厂?"
R44 R64 R65: library part RES, "厂家：Yageo"
R45 R63: library part RES, "厂家£ºYageo£"
R69 R74: library part RES1
TP1 TP2 TP3 TP4 TP5 TP6 TP7 TP8 TP9 TP10 TP11 TP12 TP13 TP14 TP15 TP16 TP17 TP18 TP19 TP20 TP21 TP22 TP24 TP25 TP26 TP27 TP28 TP29 TP30 TP31 TP33 TP34 TP41 TP43 TP46 TP47 TP48 TP49 TP50 TP51 TP52 TP53 TP54 TP55 TP56 TP69 TP70 TP71 TP72 TP73: "Test Point"
U1: library part B, "厂家£ºTI£"
U2: library part TP, "厂家：TI，型号：TPS62740DSSR"
U3: library part BQ, "厂家：T"
U4: library part S, "厂家：ST"
U6: library part nR, "厂家：Nordi"
U7: "厂家：S"
U8: library part M24C64-R, "厂家：ST，"
U10: library part LMV32, "厂家：T"
U11: library part INA216, "厂家：TI，型号：INA216A3YFFR"
Us1: library part BAT, "厂家£"
Y1: library part CRYSTAL2, "厂家£ºEPSON£"
Y2: library part CR, "厂家£ºEPSON£"

## Via types
v1: diameter 0.559, hole 0.305, Top Layer to Bottom Layer, tented both sides, 306 vias
v2: diameter 0.66, hole 0.33, Top Layer to Bottom Layer, tented both sides, 16 vias
v3: diameter 0.762, hole 0.508, Top Layer to Bottom Layer, tented both sides, 12 vias
v4: diameter 0.6, hole 0.3, Top Layer to Bottom Layer, tented both sides, 9 vias
v5: diameter 0.5, hole 0.3, Top Layer to Bottom Layer, 3 vias
v6: diameter 0.762, hole 0.559, Top Layer to Bottom Layer, tented both sides, 1 vias

## Nets (pads, with @x,y where several pads share a name; then routed paths per layer and width w, separated by ;. In a path a pad name is that pad's centre, name@x,y a point inside that pad or via, vN(x,y) a via of type N, cw(c..) or ccw(c..) an arc to the next point about the centre after c; other vN are vias at no path point)
+2.8V: C53.2 J5.1 J7.1 J7.2 J7.3 J12.1 J12.2 J12.3 L2.2 Q6.2 Q7.2 R1.2 R2.2 R3.2 R7.2 R18.1 R19.1 R20.1 R21.1 R27.1 R40.1 R43.2 R45.1 R51.1 R63.1 TP16.1 U4.5 U10.5 | length 256.7
  Top Layer w0.254: J7.1@-33.78,9.125 -33.78,8.382 J7.1@-33.78,9.325 ; J7.2@-33.28,9.125 -33.28,8.382 J7.2@-33.28,9.325 ; -32.785,8.636 -32.78,8.641 ; J7.3@-32.78,9.125 -32.78,8.641 ; J7.3@-32.78,9.325 -32.78,8.641 ; J12.1@0.795,16.848 1.937,16.848 2.348,17.259 2.359,17.27 2.359,17.571 ; J12.2@0.795,17.348 v1@2.281,17.348 ; J12.3@0.795,17.848 2.082,17.848 ; J12.3@1.195,17.848 2.082,17.848 ; v1@2.033,17.231 2.359,17.571 ; v1@2.131,17.295 ccw(c2.078,17.571) 2.359,17.571 ; v1@2.159,17.145 2.359,17.571 ; v1@2.306,17.103 2.359,17.571 ; 2.082,17.848 2.359,17.571
  Top Layer w0.4: v1(-34.671,8.382) -33.78,8.382 -33.28,8.382 -33.039,8.382 -32.785,8.636
  Top Layer w0.635: v1@-27.162,12.861 cw(c-27.426,12.3) R51.1@-26.805,12.3 ; v1@-27.151,12.854 cw(c-27.987,12.018) R51.1@-26.805,12.018 ; v1@-27.05,12.699 cw(c-27.684,12.065) R51.1@-26.788,12.065 ; -26.963,12.609 R51.1@-26.855,12.065 ; -26.845,12.324 v1(-27.178,12.827) ; R51.1@-26.818,12.297 v1(-27.178,12.827) ; v1(-27.178,12.827) -26.805,12.454 ; v1(-27.178,12.827) -26.908,12.513 R51.1@-26.855,12.065 ; v1(-27.178,12.827) -26.805,12.454 ; v1(-27.178,12.827) -26.888,12.61 R51.1@-26.855,12.065 ; v1(-27.178,12.827) -26.805,12.454 ; -26.805,12.454 R51.1@-26.805,12.065 -26.805,12.454
  Top Layer w0.762: -70.76,14.142 TP16.1@-67.84,13.856 ; -68.818,14.142 cw(c-68.818,12.878) TP16.1@-67.924,13.772 ; -68.491,14.099 TP16.1@-67.84,13.856 ; -64.977,12.814 cw(c-64.316,12.153) R1.2@-64.316,13.088 ; -64.783,12.963 R1.2@-64.316,13.007 ; v1(-46.925,0.824) -46.925,9.59 -45.822,10.693 -45.822,12.472 v1(-45.72,12.573) ; C53.2@1.77,4.826 3.377,4.826 ; C53.2@1.82,4.826 3.377,4.826 ; v1(2.197,17.259) 2.348,17.259 3.035,17.259 ; v1@3.697,5.146 3.377,4.826 ; -72.563,14.896 R3.2@-72.563,15.412 ; -72.563,14.896 R3.2@-72.563,15.412 ; -72.563,14.896 R3.2@-72.563,15.412 ; -72.563,14.896 -71.809,14.142 -68.175,14.142 -66.492,12.459 ; TP16.1@-67.84,13.856 -66.492,12.459 ; -66.492,12.459 -65.332,12.459 ; -65.332,12.459 R1.2@-64.316,12.957 ; -65.332,12.459 -64.784,13.007 ; -64.784,13.007 R1.2@-64.316,13.007 ; -64.784,13.007 R1.2@-64.316,13.007 ; -64.784,13.007 R1.2@-64.316,13.007 ; v1(-64.443,10.554) R1.2@-64.316,12.957 ; v1(-64.443,10.554) v1(-64.435,11.181) ; v1(-64.443,10.554) v1(-64.435,11.181) ; v1(-64.443,10.554) R1.2@-64.443,12.88 ; R1.2@-64.443,12.88 v1(-64.435,11.181) ; R1.2@-64.443,12.88 R1.2@-64.316,13.007 ; v1(-64.435,11.181) R1.2@-64.316,12.957 ; R1.2@-64.316,13.007 R2.2@-63.173,13.007 R1.2@-64.316,13.007 ; 3.035,17.259 v1(3.937,18.161) 3.035,17.259 ; 3.377,4.826 U10.5@3.372,4.13 3.377,4.135 3.377,4.826
  Power w0.762: -64.475,7.987 v1(-64.443,10.554) ; -64.475,8.61 v1(-64.435,11.181) ; -64.467,8.616 v1(-64.435,11.181) ; -62.667,2.046 v1(-64.475,4.045) ; -44.341,0.72 v1(-46.925,0.824) -48.259,0.72 ; v1(-39.751,12.573) -36.6,9.423 -34.671,9.423 ; v1@-34.671,8.484 -34.671,9.423 ; v1(3.937,18.161) 4.677,18.301 ; v1@4.077,18.301 4.677,18.301 ; v1(-64.475,4.045) -64.475,3.854 -62.411,1.791 v1(-58.093,1.791) -49.33,1.791 -48.259,0.72 ; v1(-64.475,4.045) -64.475,11.03 v1(-64.443,10.554) ; v1(-64.443,10.554) v1(-64.435,11.181) ; v1(-64.443,10.554) v1(-64.435,11.181) ; -48.259,0.72 -3.267,0.72 -2.037,1.95 2.54,1.95 ; -34.671,9.423 -33.209,9.423 -30.923,11.709 -29.644,11.709 -28.526,12.827 ; -28.526,12.827 v1(-27.178,12.827) -28.526,12.827 ; 2.54,1.95 2.634,2.044 2.634,4.144 ; 2.54,1.95 3.474,1.95 6.35,4.826 6.35,5.08 ; 2.634,4.144 v1(3.697,5.207) 2.634,4.144 ; 4.677,18.301 5.407,17.571 5.407,14.396 6.35,13.453 6.35,5.08 ; 6.35,5.08 J5.1@8.001,5.08 6.35,5.08
  Bottom Layer w0.762: Q6.2@-65.811,4.045 R45.1@-67.056,4.101 Q6.2@-65.689,4.101 ; v1(-58.093,1.791) -58.093,2.885 -57.29,3.688 R63.1@-55.68,3.688 ; Q7.2@-54.435,3.632 R63.1@-55.68,3.688 ; Q7.2@-54.329,3.688 R63.1@-55.68,3.688 ; L2.2@-49.784,11.811 -49.022,12.573 v1(-45.72,12.573) v1(-39.751,12.573) ; v1(-46.925,0.824) R7.2@-46.925,3.442 ; R20.1@-3.11,7.665 R18.1@-3.11,6.606 R19.1@-3.11,5.548 R21.1@-3.11,4.49 -3.11,2.029 v1@-2.54,1.459 ; R40.1@0.043,17.521 1.343,17.521 ; R43.2@1.343,19.476 1.343,17.521 ; v1(2.197,17.259) 1.935,17.521 1.613,17.521 1.343,17.521 ; v1@3.678,5.188 U4.5@2.947,5.188 v1(3.697,5.207) ; R27.1@6.223,4.199 7.12,4.199 ; v1(-64.475,4.045) -65.456,4.045 v1(-64.475,4.045) ; v1(-64.475,4.045) Q6.2@-65.634,4.045 v1(-64.475,4.045) ; 7.12,4.199 J5.1@8.001,5.08 7.12,4.199
  other v1: -2.54,1.397
A_2.06V: J2.5 J2.6 R67.2 R71.1 TP2.1 | length 8.8
  Top Layer w0.254: TP2.1@-31.233,10.922 -30.734,11.421 -30.734,12.646 ; J2.6@-30.78,13.675 -30.78,12.654 -30.772,12.646 -30.734,12.646 ; -30.734,12.7 -30.734,12.646 ; J2.5@-30.28,13.675 -30.28,12.646 -30.734,12.646
  Bottom Layer w0.254: R71.1@-32.639,10.541 R67.2@-32.639,11.43 -30.734,11.43 -30.353,11.811 v1(-30.353,12.7)
A_2.76V: J2.7 J2.8 R72.2 R73.1 TP3.1 | length 7.4
  Top Layer w0.254: TP3.1@-33.233,10.922 -32.512,10.922 -31.75,11.684 v1@-31.75,12.573 ; J2.8@-31.78,13.675 -31.78,12.603 -31.339,12.603 -31.28,12.662 J2.7@-31.28,13.675
  Bottom Layer w0.254: R73.1@-32.639,13.208 R72.2@-32.639,12.319 -31.75,12.319 v1(-31.496,12.573)
ADAPTER: D2.2 L5.2 Q1.5 Q1.6 Q1.7 Q1.8 Q4.4 Q4.8 R14.2 R15.2 R34.2 R57.2 TP1.1 | length 82.7
  Top Layer w1.27: -21.717,8.661 TP1.1@-21.717,10.795
  Top Layer w2.54: v1@-16.103,5.842 -16.103,6.705 -18.059,8.661 -21.717,8.661 -24.988,11.933 ; -24.988,11.933 v3(-24.892,12.446) ; -24.988,11.933 v3(-24.892,12.446) ; -24.988,11.933 v1(-24.892,13.081) ; -24.988,11.933 v1(-24.892,13.081) ; -24.988,11.933 v1(-24.892,13.081) ; -24.988,11.933 v1(-24.892,13.081) ; -24.988,11.933 -24.988,13.081 -24.988,13.62 ; -24.988,13.62 v3(-24.892,12.446) ; -24.988,13.62 v1(-24.892,13.081) ; -24.988,13.62 v1(-24.892,13.081) ; v3(-24.892,12.446) v1(-24.892,13.081) ; v3(-24.892,12.446) v1(-24.892,13.081) ; v3(-24.892,12.446) v1(-24.892,13.081)
  Bottom Layer w0.254: Q4.4@-31.354,16.957 -31.354,16.398 Q4.4@-31.354,16.984
  Bottom Layer w0.508: -31.354,16.398 -31.212,16.256 -30.734,16.256 -30.353,16.637 ; Q4.8@-31.196,17.78 -30.48,17.78 -30.353,17.653 -30.353,16.764 ; R15.2@-12.319,4.437 -12.319,5.715 R15.2@-12.319,4.487 ; -11.938,5.771 -11.635,5.771 ; Q1.5@-10.591,5.121 -11.635,5.121 ; Q1.6@-10.591,5.771 -11.635,5.771 ; Q1.7@-10.591,6.421 -11.624,6.421 ; Q1.5@-10.476,5.121 -11.635,5.121 ; Q1.6@-10.476,5.771 -11.635,5.771 ; Q1.8@-10.476,7.071 -9.433,7.071 -9.427,7.065 -9.427,6.421 Q1.7@-10.476,6.421 -11.624,6.421 ; -11.635,5.121 -11.635,5.771 ; -11.635,5.771 -11.635,6.432 -11.624,6.421
  Bottom Layer w0.762: -30.353,16.637 -30.353,16.764 ; R57.2@-25.908,16.976 -25.908,16.51 R57.2@-25.908,17.026 ; R14.2@-16.569,5.58 ccw(c-16.569,6.663) v1@-15.803,5.897 ; -16.289,5.617 v1(-15.875,5.969) ; -15.963,5.58 ccw(c-15.963,6.475) v3(-15.33,5.842) ; v3@-15.621,5.715 -15.756,5.58 ; v1(-15.875,5.969) -15.756,5.58 ; v1(-15.875,5.969) -15.756,5.58 ; v1(-15.875,5.969) -15.756,5.58 ; v1(-15.875,5.969) -15.756,5.58 ; v1(-15.875,5.969) -15.731,5.61 v3(-15.33,5.842) ; v1(-15.875,5.969) v3(-15.33,5.842) ; v1(-15.875,5.969) v3(-15.33,5.842) ; v1(-15.875,5.969) v3(-15.33,5.842) ; v1(-15.875,5.969) v3(-15.33,5.842) ; v1(-15.875,5.969) v3(-15.33,5.842) ; v1(-15.875,5.969) v3(-15.33,5.842) ; -15.756,5.58 ccw(c-15.756,6.057) v3(-15.33,5.842) ; -15.756,5.58 v3(-15.33,5.842) ; -15.756,5.58 v3(-15.33,5.842) ; -15.756,5.58 R14.2@-16.637,5.58 v3(-15.33,5.842) ; v3(-15.33,5.842) -16.027,5.725 -16.637,5.63 v3(-15.33,5.842) ; -30.234,17.026 R34.2@-28.956,17.026 -30.234,17.026
  Bottom Layer w1.27: -26.392,15.822 -25.976,16.238
  Bottom Layer w1.397: v3@-15.621,5.715 -12.319,5.715 -11.691,5.715
  Bottom Layer w1.524: -30.353,16.637 -30.353,15.494 -29.337,14.478 -26.308,14.478 ; -26.308,15.738 -26.308,14.478 ; v3@-25.146,12.7 v3(-25.4,12.954) ; -26.308,13.862 v3(-25.4,12.954) ; -26.308,13.862 v3(-25.908,13.462) ; -26.308,13.862 v3(-25.908,13.462) ; -26.308,13.862 v3(-25.908,13.462) ; -26.308,13.862 v3(-25.908,13.462) ; -26.308,13.862 -26.308,14.478 ; -26.308,14.478 v3(-25.908,13.462) ; -26.308,14.478 v3(-25.908,13.462) ; -26.308,14.478 v3(-25.908,13.462) ; v3(-25.908,13.462) v3(-25.4,12.954) ; v3(-25.908,13.462) v3(-25.4,12.954) ; v3(-25.908,13.462) v3(-25.4,12.954)
  other v1: -25.4,13.589
AGND: C50.2 C51.1 C53.1 D16.2 L3.1 R53.1 R55.2 U10.2 | length 115.5
  Top Layer w0.508: L3.1@-0.41,3.091 ccw(c-0.093,3.64) 0.071,3.027 ; L3.1@-0.369,2.782 cw(c-0.035,2.448) -0.035,2.921 cw(c-0.035,3.394) L3.1@-0.369,3.06 ; L3.1@-0.326,2.921 ccw(c-0.326,4.807) R53.1@1.008,3.473 ; 0.518,5.324 cw(c0.019,4.826) C53.1@0.724,4.826 ; 0.617,3.174 L3.1@-0.508,2.921 ; 0.63,5.178 0.72,4.826 v1(0.254,5.588) ; C53.1@0.7,5.008 v1(0.254,5.588) ; 0.77,3.913 ccw(c1.674,3.913) R53.1@1.198,3.145 ; C53.1@0.82,4.826 0.967,4.091 ; R53.1@0.904,3.203 0.945,4.131 ; R53.1@0.903,3.21 0.967,4.091 ; R53.1@1.173,3.569 L3.1@-0.508,2.921 ; R53.1@1.248,2.841 C51.1@3.056,2.921 ; R53.1@1.257,2.84 2.378,2.985 ; R53.1@1.292,2.841 L3.1@-0.508,2.921 ; R53.1@1.355,2.85 1.923,3.174 ; R53.1@1.367,3.569 C51.1@3.056,2.921 ; R53.1@1.395,3.56 1.923,3.174 ; R53.1@1.403,3.557 2.378,2.985 ; R53.1@1.466,3.576 cw(c2.24,4.826) C53.1@0.77,4.826 ; R53.1@1.532,3.473 ccw(c2.866,4.807) C51.1@2.866,2.921 ; R53.1@1.584,3.459 0.967,4.091 ; R53.1@1.585,3.458 0.945,4.131 ; C50.2@1.897,8.382 2.54,8.382 ; C50.2@1.947,8.382 2.54,8.382 ; v1(2.794,9.652) 2.794,8.636 2.54,8.382 ; D16.2@4.201,10.044 v1(3.601,10.205) ; D16.2@4.201,10.366 v1(3.601,10.205) ; D16.2@4.543,9.748 5.49,9.134 ; D16.2@4.546,9.745 ccw(c3.601,9.004) v1(3.601,10.205) ; D16.2@4.546,10.665 cw(c3.601,11.405) v1(3.601,10.205) ; D16.2@4.916,9.491 cw(c4.536,8.242) R55.2@5.842,8.242 ; D16.2@4.951,9.481 v1(3.601,10.205) ; D16.2@4.951,10.928 v1(3.601,10.205) ; D16.2@5.064,9.977 cw(c4.744,8.927) 5.842,8.927 ; U10.2@5.522,5.08 v1(4.699,5.08) U10.2@5.772,5.08 ; 5.667,8.895 5.842,8.424 D16.2@5.842,9.496 ; R55.2@5.842,8.374 D16.2@5.842,9.496 ; D16.2@5.879,10.193 5.49,9.134 ; L3.1@-0.508,2.921 R53.1@1.27,3.211 ; L3.1@-0.508,2.921 1.283,2.84 0.162,2.985 ; L3.1@-0.508,2.921 1.137,3.557 0.162,2.985 ; L3.1@-0.508,2.921 R53.1@1.27,3.211 ; L3.1@-0.508,2.921 0.162,2.985 ; L3.1@-0.508,2.921 0.162,2.985 ; L3.1@-0.508,2.921 0.162,2.985 ; L3.1@-0.508,2.921 0.955,2.921 R53.1@1.27,3.236 ; 0.162,2.985 R53.1@1.27,3.211 ; v1(0.254,5.588) 0.77,5.072 C53.1@0.77,4.826 ; R53.1@0.77,3.736 C53.1@0.77,4.826 ; R53.1@0.77,3.736 C53.1@0.77,4.826 ; R53.1@0.77,3.736 R53.1@1.27,3.236 ; C53.1@0.77,4.826 0.906,3.189 C53.1@0.77,4.826 ; C53.1@0.77,4.826 1.608,3.413 C53.1@0.77,4.826 ; C53.1@0.77,4.826 R53.1@1.27,3.261 ; C53.1@0.77,4.826 R53.1@1.27,3.261 ; 0.945,4.131 R53.1@1.27,3.261 ; 0.967,4.091 R53.1@1.27,3.261 ; R53.1@1.27,3.211 C51.1@3.056,2.921 ; R53.1@1.27,3.211 C51.1@3.006,2.921 ; R53.1@1.27,3.211 C51.1@3.006,2.921 ; R53.1@1.27,3.211 2.378,2.985 ; R53.1@1.27,3.211 1.923,3.174 ; R53.1@1.27,3.236 R53.1@1.585,2.921 ; R53.1@1.585,2.921 C51.1@3.006,2.921 ; R53.1@1.585,2.921 C51.1@3.056,2.921 ; 1.923,3.174 C51.1@3.006,2.921 ; C51.1@3.006,2.921 1.369,3.568 C51.1@3.006,2.921 ; C51.1@3.006,2.921 1.248,2.841 C51.1@3.006,2.921 ; v1(3.601,10.205) 4.049,10.292 ; v1(3.601,10.205) 4.049,10.292 ; v1(3.601,10.205) 4.049,10.292 ; v1(3.601,10.205) 4.049,10.118 ; v1(3.601,10.205) 4.049,10.118 ; v1(3.601,10.205) 4.049,10.118 ; v1(3.601,10.205) 4.822,9.527 4.049,10.292 ; v1(3.601,10.205) D16.2@5.133,10.205 ; v1(3.601,10.205) 4.934,9.486 4.049,10.118 ; v1(3.601,10.205) D16.2@5.133,10.205 ; v1(3.601,10.205) 4.934,10.924 4.049,10.292 ; v1(3.601,10.205) 4.822,10.883 4.049,10.118 ; v1(3.601,10.205) D16.2@5.133,10.205 ; 4.049,10.118 D16.2@5.133,10.205 ; 4.049,10.292 D16.2@5.133,10.205 ; D16.2@5.133,10.205 5.49,9.134 ; D16.2@5.133,10.205 D16.2@5.842,9.496 ; v1@0.247,5.563 cw(c0.146,5.186) 0.485,5.381 ccw(c0.146,5.186) v1@0.247,5.563
AW_ADC: C50.1 D15.2 D16.1 R58.2 TP56.1 U6.10 | length 147.2
  Top Layer w0.508: TP56.1@-1.444,13.669 cw(c-1.864,13.249) -1.27,13.249 cw(c-0.676,13.249) TP56.1@-1.096,13.669 ; -1.19,13.223 v1(-0.889,12.745) ; TP56.1@-1.084,13.682 ccw(c-0.707,13.353) -1.061,12.999 ; v1@-0.871,12.727 cw(c-0.214,12.07) -0.214,12.999 ; -0.455,12.967 v1(-0.889,12.745) ; D15.2@-0.096,12.854 v1(-0.889,12.745) ; D15.2@-0.096,13.143 v1(-0.889,12.745) ; D15.2@0.102,12.866 D16.1@0.946,10.3 ; D15.2@0.101,12.871 D16.1@0.897,10.473 ; D15.2@0.104,12.854 D16.1@0.956,10.475 ; D15.2@0.115,12.808 0.829,11.571 ; D15.2@0.143,12.723 D16.1@1.168,11.152 ; D15.2@0.148,12.711 0.951,11.757 ; D15.2@0.156,12.693 0.926,11.889 ; D15.2@0.167,12.669 D16.1@1.626,10.548 ; D15.2@0.166,12.67 D16.1@1.656,10.481 ; D16.1@0.217,10.22 D15.2@0.628,12.055 ; D16.1@0.223,10.296 D15.2@0.897,12.73 ; D15.2@0.223,12.574 1.093,11.974 ; D16.1@0.233,10.359 0.843,11.439 ; D15.2@0.234,12.558 ccw(c-0.635,11.922) -0.635,12.999 ; D15.2@0.234,13.439 cw(c-0.635,14.076) -0.635,12.999 ; D16.1@0.243,10.4 0.966,11.641 ; D15.2@0.309,12.471 cw(c-1.112,11.05) D16.1@0.897,11.05 ; D16.1@0.436,10.732 ccw(c-0.679,11.846) 0.897,11.846 ; D15.2@0.463,12.353 cw(c-0.17,11.257) 1.053,11.584 ; D15.2@0.508,12.329 -0.2,13.09 ; D15.2@0.508,13.669 -0.2,12.907 ; D15.2@0.631,12.281 -0.2,12.907 ; D15.2@0.631,13.716 -0.2,13.09 ; D15.2@0.635,12.798 D15.2@0.836,12.999 ; D15.2@0.709,13.126 D15.2@0.836,12.999 ; C50.1@0.897,8.382 R58.2@0.897,7.366 0.897,12.938 D15.2@0.836,12.999 ; 0.897,11.345 cw(c2.49,11.345) D15.2@1.364,12.471 ; D15.2@0.897,12.165 ccw(c2.923,12.165) D16.1@1.491,10.732 ; 1.098,11.414 cw(c2.18,11.704) D15.2@1.373,12.481 ; D15.2@1.555,12.8 0.829,11.571 ; D15.2@1.557,12.806 0.926,11.889 ; D15.2@1.565,12.842 0.951,11.757 ; D15.2@1.572,13.122 D16.1@1.626,10.548 ; D15.2@1.571,13.128 D16.1@1.656,10.481 ; D15.2@1.576,12.906 D16.1@0.897,10.473 ; D15.2@1.577,12.913 1.093,11.974 ; D15.2@1.578,12.924 D16.1@0.956,10.475 ; D15.2@1.578,12.926 D16.1@0.946,10.3 ; D15.2@1.582,12.982 D16.1@1.168,11.152 ; D16.1@1.649,10.497 0.843,11.439 ; D16.1@1.684,10.397 0.966,11.641 ; D16.1@1.698,10.334 D15.2@0.897,12.73 ; -1.27,13.208 v1(-0.889,12.745) ; -1.27,13.208 TP56.1@-1.27,13.843 ; -1.27,13.208 TP56.1@-1.27,13.843 ; -1.27,13.208 -1.061,12.999 ; -1.27,13.208 TP56.1@-1.27,13.843 ; TP56.1@-1.27,13.843 -1.061,12.999 ; TP56.1@-1.27,13.843 v1(-0.889,12.745) ; -1.061,12.999 -0.635,12.999 ; v1(-0.889,12.745) 0.647,12.277 -0.635,12.999 ; v1(-0.889,12.745) 0.647,13.72 -0.635,12.999 ; v1(-0.889,12.745) D15.2@0.836,12.999 ; v1(-0.889,12.745) -0.635,12.999 ; -0.635,12.999 D15.2@0.836,12.999 ; -0.2,12.907 D15.2@0.836,12.999 ; -0.2,13.09 D15.2@0.836,12.999 ; D16.1@0.28,10.504 0.092,13.053 D16.1@0.282,10.511 ; D16.1@0.28,10.504 1.533,12.732 D16.1@0.282,10.511 ; D16.1@0.28,10.504 D15.2@0.836,12.999 ; D16.1@0.282,10.511 D15.2@0.836,12.999 ; D15.2@0.628,12.055 D16.1@1.656,10.481 ; D15.2@0.628,12.055 D16.1@0.963,10.205 ; 0.829,11.571 D15.2@0.836,12.999 ; D15.2@0.836,12.999 D16.1@0.897,10.473 ; D15.2@0.836,12.999 D16.1@1.168,11.152 ; D15.2@0.836,12.999 D16.1@1.626,10.548 ; D15.2@0.836,12.999 D16.1@0.956,10.475 ; D15.2@0.836,12.999 D16.1@1.656,10.481 ; D15.2@0.836,12.999 D16.1@0.946,10.3 ; D15.2@0.836,12.999 0.951,11.757 ; D15.2@0.836,12.999 0.926,11.889 ; D15.2@0.836,12.999 1.093,11.974 ; 0.843,11.439 D16.1@0.963,10.205 ; D15.2@0.897,12.73 D16.1@0.963,10.205 ; D16.1@0.963,10.205 0.966,11.641 ; v1@-0.867,12.732 cw(c-0.283,12.395) -0.457,13.046 ccw(c-0.283,12.395) v1@-0.867,12.732
  Bottom Layer w0.152: U6.10@-4.434,13.195 U6.10@-4.422,13.183 -1.327,13.183 ; U6.10@-4.197,13.183 -3.64,13.183 ; v1@-1.092,12.745 ccw(c-1.583,12.745) -1.236,13.092 ccw(c-0.889,13.438) v1@-0.889,12.948 ; v1@-1.054,12.627 -1.327,13.183 ; v1@-0.771,12.91 -1.327,13.183 ; -1.327,13.183 v1(-0.889,12.745) -1.327,13.183
AW_LOAD: C2.1 C4.1 C5.1 C58.1 C59.1 D14.2 J2.9 J2.10 J2.11 J2.12 Q12.3 R67.1 R72.1 TP54.1 | length 79.5
  Top Layer w0.254: J2.12@-33.78,13.475 -33.78,12.7 J2.12@-33.78,13.675 -33.78,15.496 -33.528,15.748 -32.893,15.748 -32.512,15.748 -32.28,15.516 J2.9@-32.28,13.675 ; J2.12@-33.78,13.875 -33.78,14.787 ; J2.11@-33.28,13.675 -33.28,15.679 ; J2.11@-33.28,13.875 -33.28,14.787 ; J2.10@-32.78,13.675 -32.78,15.734 ; J2.10@-32.78,13.875 -32.78,14.787 ; J2.9@-32.28,13.875 -32.28,14.787
  Top Layer w0.508: TP54.1@-41.736,16.59 cw(c-41.365,16.219) -41.365,16.744 ; TP54.1@-41.736,16.938 ccw(c-41.267,17.407) -41.267,16.744 ; C4.1@-41.013,14.351 C59.1@-41.013,15.494 -41.013,16.744 ; -39.243,17.698 C5.1@-38.535,17.698 C2.1@-37.011,17.698 ; C5.1@-38.674,17.559 ccw(c-39.008,17.225) -39.008,17.698 ccw(c-39.008,18.171) C5.1@-38.674,17.836 ; C5.1@-38.396,17.559 cw(c-38.062,17.225) -38.062,17.698 cw(c-38.062,18.171) C5.1@-38.396,17.836 ; C2.1@-37.15,17.559 ccw(c-37.484,17.225) -37.484,17.698 ccw(c-37.484,18.171) C2.1@-37.15,17.836 ; v1@-34.544,11.836 ccw(c-34.544,12.822) -33.847,12.125 ; -34.051,11.968 v1(-34.544,11.811) ; -33.78,12.7 -33.78,12.192 ; -41.013,16.744 TP54.1@-41.91,16.764 -41.89,16.744 -41.013,16.744 ; v1(-34.544,11.811) -34.161,11.811 ; v1(-34.544,11.811) -33.78,12.192 ; v1(-34.544,11.811) -34.161,11.811 ; -34.161,11.811 -33.78,12.192
  Top Layer w1.27: TP54.1@-41.91,16.629 ccw(c-41.91,18.517) -40.575,17.182 ; -41.151,13.688 Q12.3@-40.742,9.08 -41.151,9.49 -41.151,16.606 -41.013,16.744 ; C2.1@-37.011,17.698 -33.63,17.755 ; -32.893,15.748 -32.893,17.018 -33.63,17.755 ; -41.013,16.744 C58.1@-40.059,17.698 ; -41.013,16.744 C58.1@-40.059,17.698 ; C58.1@-40.059,17.698 C5.1@-38.535,17.698 ; C58.1@-40.059,17.698 C5.1@-38.535,17.698 ; C58.1@-40.059,17.698 C58.1@-40.002,17.755 ; C58.1@-40.059,17.698 -39.243,17.698 C5.1@-38.535,17.698 ; C58.1@-40.002,17.755 C5.1@-38.535,17.698 ; C58.1@-40.002,17.755 -37.011,17.755 -33.63,17.755
  Bottom Layer w0.508: v1@-34.543,11.786 cw(c-34.499,10.57) R67.1@-33.639,11.43 ; -33.963,11.655 v1(-34.544,11.811) ; R67.1@-33.929,11.645 v1(-34.544,11.811) ; R67.1@-33.686,11.433 ccw(c-34.544,10.649) v1(-34.544,11.811) ; v1(-34.544,11.811) -34.184,11.745 R67.1@-33.689,11.43 ; v1(-34.544,11.811) -34.02,11.811 ; v1(-34.544,11.811) -34.02,11.811 ; v1(-34.544,11.811) -34.02,11.811 ; v1(-34.544,11.811) R67.1@-33.689,11.43 ; v1(-34.544,11.811) R67.1@-33.689,11.43 ; v1(-34.544,11.811) R67.1@-33.689,11.43 ; v1(-34.544,11.811) R67.1@-33.639,11.43 ; v1(-34.544,11.811) R67.1@-33.689,11.43 ; v1(-34.544,11.811) R67.1@-33.689,11.43 ; v1(-34.544,11.811) -34.193,11.757 R67.1@-33.689,11.43 ; v1(-34.544,11.811) -34.02,11.811 ; -34.02,11.811 R67.1@-33.689,11.43 ; -34.02,11.811 R67.1@-33.689,11.43 ; -34.02,11.811 R67.1@-33.639,11.43 ; R67.1@-33.639,11.43 R72.1@-33.639,12.319 R67.1@-33.639,11.43
AW_OUT: C52.2 R13.2 R58.1 TP53.1 U10.4 | length 21.2
  Top Layer w0.254: TP53.1@1.419,5.724 2.418,5.969 ; TP53.1@1.468,5.73 2.07,6.037 ; TP53.1@1.491,6.169 ccw(c1.899,6.485) 1.899,5.969 ; TP53.1@1.509,6.452 2.418,5.969 ; TP53.1@1.531,6.444 2.07,6.037 ; TP53.1@1.661,5.832 cw(c1.991,5.502) 1.991,5.969 ; TP53.1@1.692,6.325 ccw(c2.417,6.887) 2.417,5.969 ; R58.1@1.897,7.366 2.413,7.366 ; R58.1@1.947,7.366 2.413,7.366 ; R58.1@2.034,7.279 cw(c2.244,7.069) 2.244,7.366 cw(c2.244,7.663) R58.1@2.034,7.453 ; 2.557,5.969 ccw(c2.557,6.595) U10.4@3,6.152 ; 2.629,7.366 R13.2@3.641,7.366 ; U10.4@3.069,6.195 2.719,5.99 ; U10.4@3.086,6.199 2.418,5.969 ; U10.4@3.102,5.858 2.719,5.99 ; U10.4@3.116,5.857 2.418,5.969 ; U10.4@3.372,6.03 3.311,5.969 2.418,5.969 ; R13.2@3.554,7.279 ccw(c3.344,7.069) 3.344,7.366 ccw(c3.344,7.663) R13.2@3.554,7.453 ; R13.2@3.604,7.453 ccw(c3.394,7.663) 3.691,7.663 ccw(c3.988,7.663) R13.2@3.778,7.453 ; C52.2@3.604,8.295 cw(c3.394,8.085) 3.691,8.085 cw(c3.988,8.085) C52.2@3.778,8.295 ; R13.2@3.683,7.374 R13.2@3.691,7.366 ; R13.2@3.691,7.37 C52.2@3.691,8.382 R13.2@3.691,7.366 ; TP53.1@1.397,6.096 2.418,5.969 ; TP53.1@1.397,6.096 2.07,6.037 ; TP53.1@1.397,6.096 1.524,5.969 2.418,5.969 ; 2.413,7.366 2.418,7.361 2.418,5.969 ; 2.413,7.366 R13.2@3.691,7.366 ; 2.418,5.969 3.122,6.03 2.719,5.99